# Altium PCB Group6TsvPCB.PcbDoc
Units mil, origin at the board's own origin, x right, y up, seen from the top; angles counter-clockwise.
Board outline 2263.78 x 3543.31 mil, 2 copper layers (Top Layer, Bottom Layer); 32 components, 22 nets, 177 pads, 23 vias.
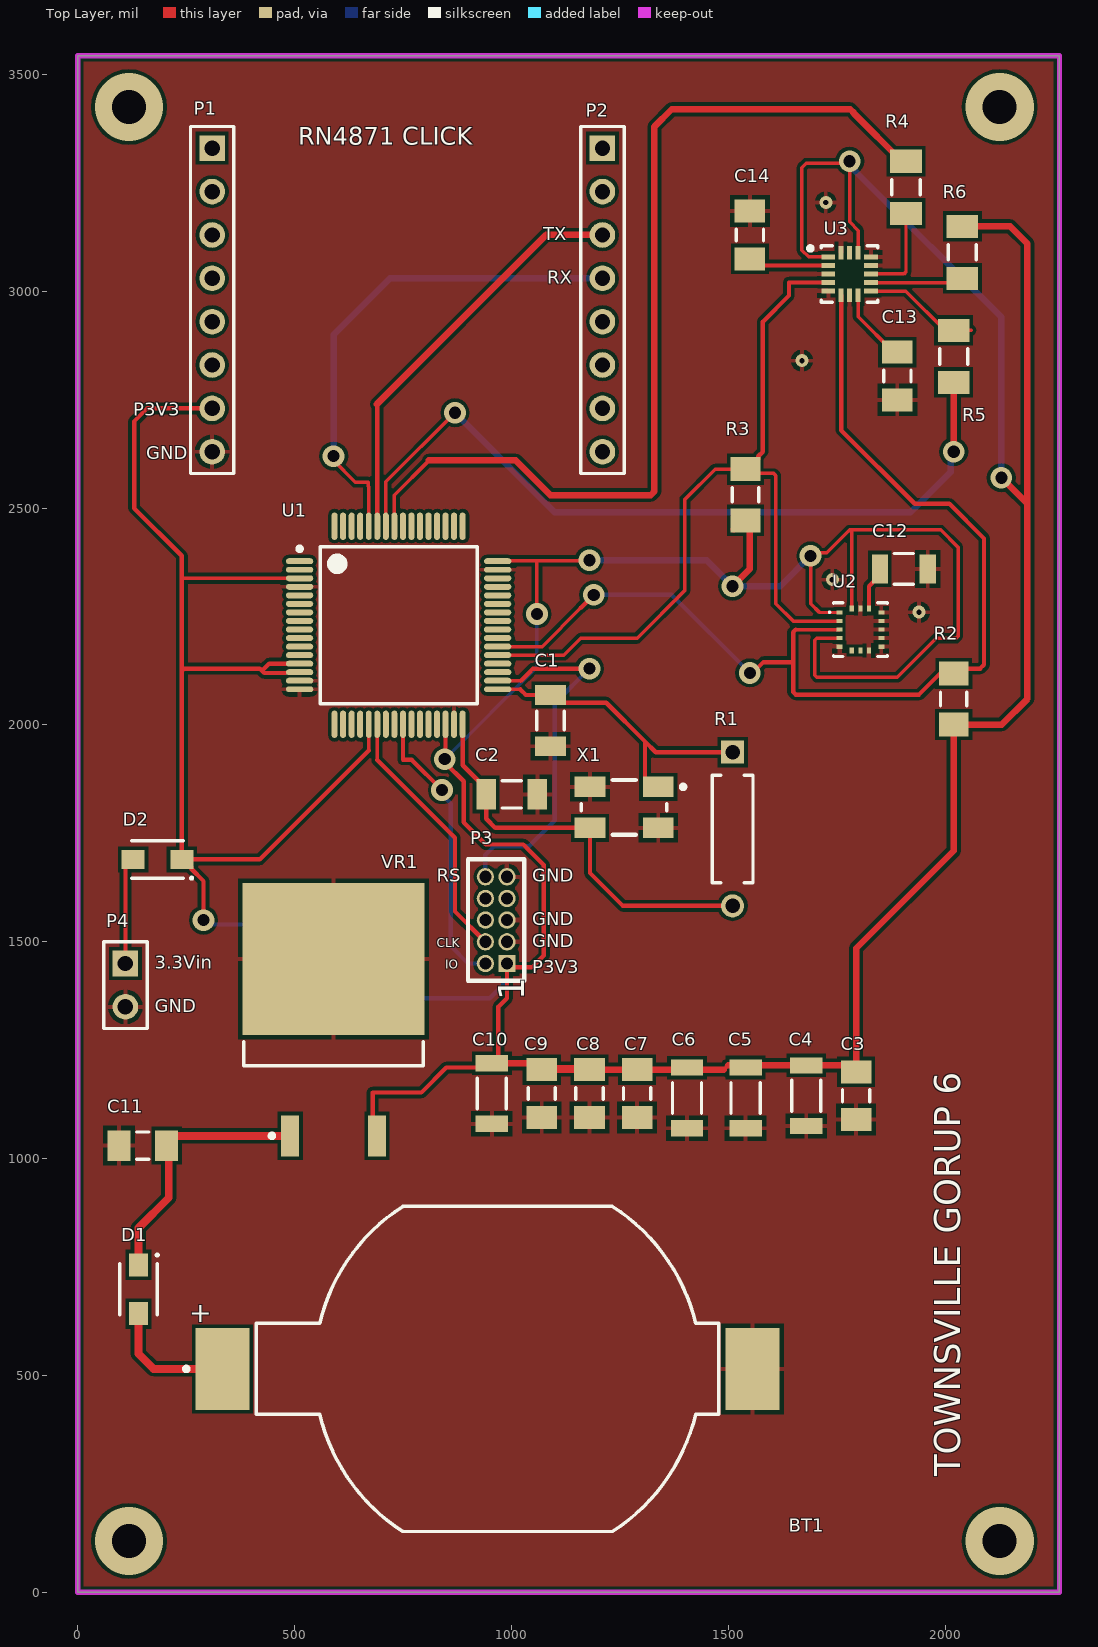
[diagram p0: Top Layer view]
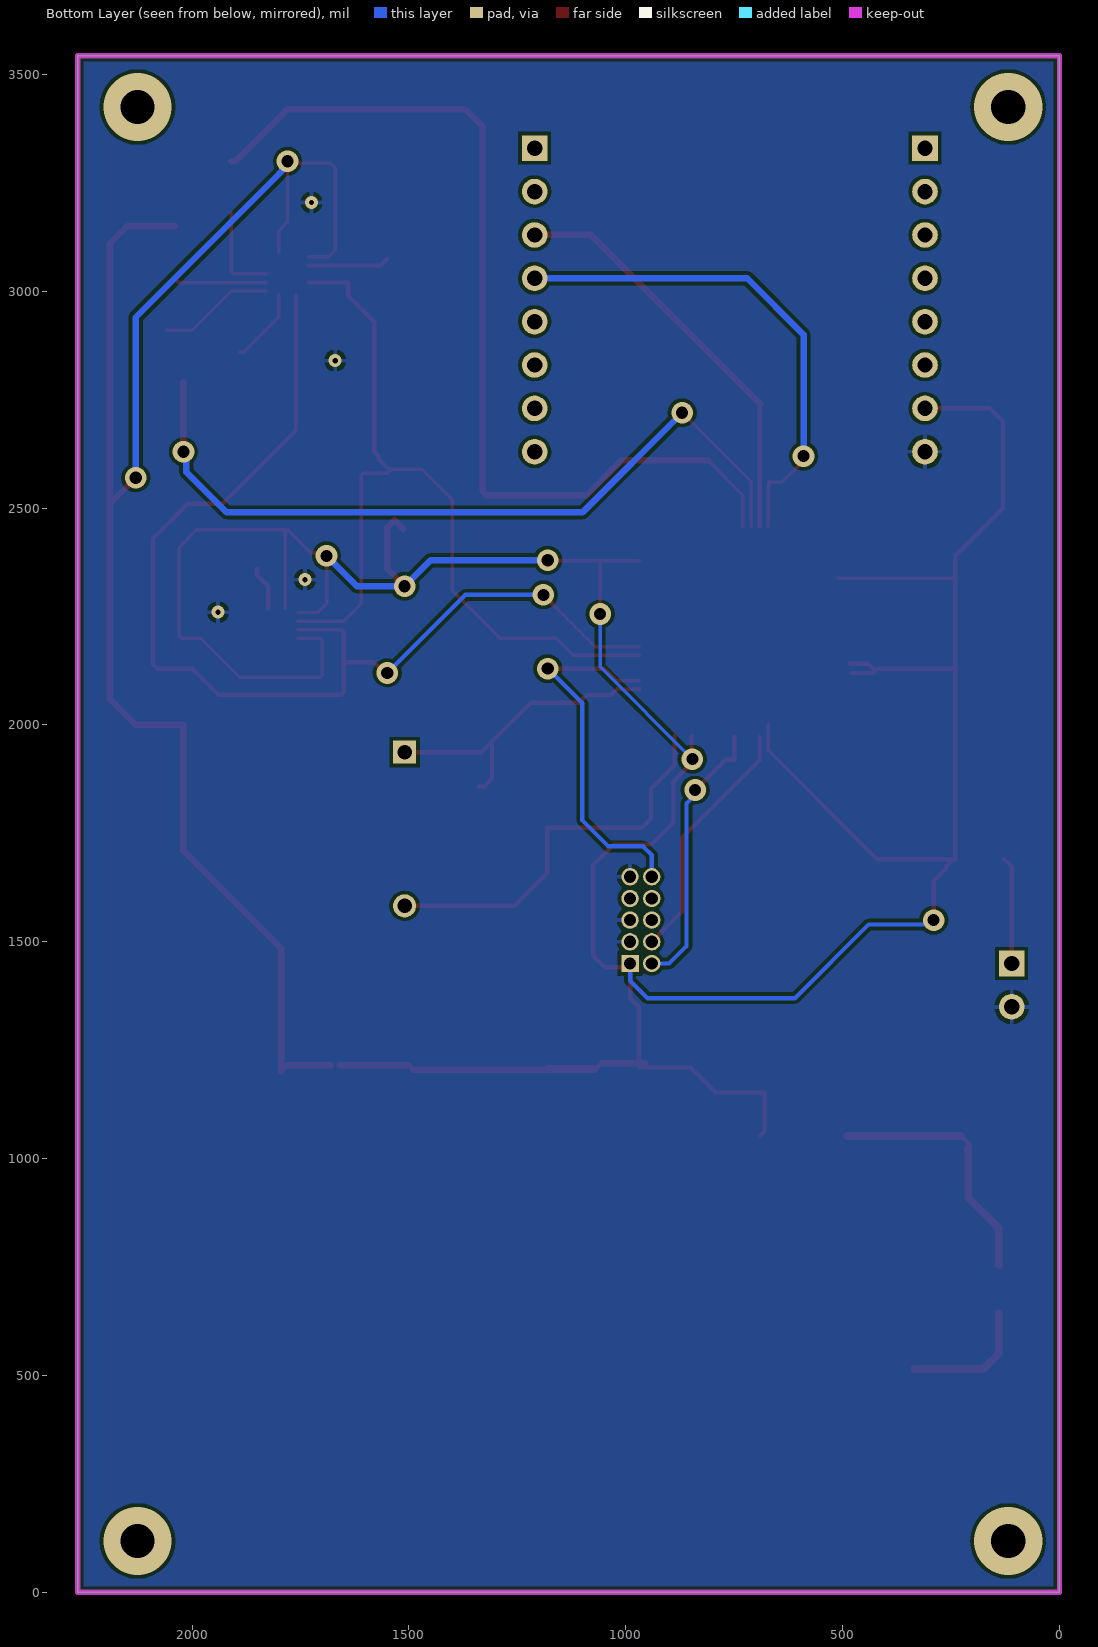
[diagram p1: Bottom Layer view, seen from below]

## Layer stack, top to bottom
Top Solder: solder mask 0.4, Solder Resist, Dk 3.5
Top Layer: signal copper 1.4
Dielectric 1: dielectric 12.6, FR-4, Dk 4.8
Bottom Layer: signal copper 1.4
Bottom Solder: solder mask 0.4, Solder Resist, Dk 3.5

## Board outline
0,0 0,3543.31 2263.78,3543.31 2263.78,0

## Design rules (kind name [scope] priority, off if disabled: settings)
BoardOutlineClearance [All] p1: gap=11.81 ignorepadtopadclearanceinfootprint=FALSE
Clearance [All] p1: gap=8 ignorepadtopadclearanceinfootprint=TRUE
HoleSize [All] p1: absolutevalues=TRUE maxlimit=100 minlimit=12 maxpercent=80.000 minpercent=20.000
MinimumAnnularRing [All] p1: minimumring=6
MinimumSolderMaskSliver [All] p1: minsoldermaskwidth=1
PolygonConnect [All] p1: connectstyle=Relief reliefconductorwidth=10 reliefentries=4 polygonreliefangle="90 Angle" airgapwidth=10
RoutingVias [All] p1: holewidth=28 width=50 viastyle="Through Hole" minholewidth=28 minwidth=50 maxholewidth=28 maxwidth=50
SilkToSilkClearance [All] p1: silktosilkclearance=3.94
SolderMaskExpansion [All] p1: expansion=4 istentingtop=FALSE
Width [All] p1: maxlimit=19.68 minlimit=8 preferedwidth=10
27 further rules are at their usual default settings.

## Classes and differential pairs
component class Sensors: BT1 C10 C12 C14 D1 D2 P3 P4 R2 R3 R4 R5 R6 U2 U3 VR1
component class Microcontroller: C1 C2 C3 C6 C8 P1 P2 R1 U1 X1

## Components (designator, comment, footprint, x,y, rotation, side; value= is the part's Value field where it differs from the comment)
BT1 "796136-1" TECO-796136-1_V 945,515 r0 top
C1 "CAP 22pF 50V 1206(3216)" CAPC1206(3216)100_N 1090,2010 r90 top value=22pF
C2 "CAP 22pF 50V 1206(3216)" CAPC1206(3216)100_N 1000.94,1840 r180 top value=22pF
C3 "GRM319R71H104KA01D" CAPC3216X95X55NL15T25 1795,1145.12 r270 top
C4 "Capacitor 1 uF +/- 10% 25 V 1206" CAPC3216X180X20ML20 1680,1145.12 r270 top value=1µF
C5 "Capacitor 1 uF +/- 10% 25 V 1206" CAPC3216X180X20ML20 1540,1140.12 r270 top value=1µF
C6 "Capacitor 1 uF +/- 10% 25 V 1206" CAPC3216X180X20ML20 1405,1140 r270 top value=1µF
C7 "GRM319R71H104KA01D" CAPC3216X95X55NL15T25 1290,1150.24 r90 top
C8 "GRM319R71H104KA01D" CAPC3216X95X55NL15T25 1180,1150.12 r270 top
C9 "GRM319R71H104KA01D" CAPC3216X95X55NL15T25 1070,1150.24 r270 top
C10 "Capacitor 1 uF +/- 10% 25 V 1206" CAPC3216X180X20ML20 955,1150.12 r270 top value=1µF
C11 "GRM319R71H104KA01D" CAPC3216X95X55NL15T25 150,1030 r180 top
C12 "C1206C103K2RACTU" FP-C1206C-EB-MFG 1904.88,2360 r180 top value="10,000 pF"
C13 "GRM319R71H104KA01D" CAPC3216X95X55NL15T25 1890,2804.88 r270 top
C14 "GRM319R71H104KA01D" CAPC3216X95X55NL15T25 1550,3130 r90 top
D1 "Diode MBR120VLSFT1G" SODFL360X100-2N 140,698.9 r270 top
D2 "Diode MBR120VLSFT1G" SODFL360X100-2N 183.9,1690 r180 top
P1 "Header 8" HDR1X8 310,3330 r270 top
P2 "Header 8" HDR1X8 1210,3330 r270 top
P3 "Header 1.27mm 2x5 PTH" "Header 1.27mm 2x5 PTH" 990,1450 r90 top
P4 "Header 2" HDR1X2 110,1450 r270 top
R1 "MFR-25FBF52-1M" RESA60-630X240 1510,1760 r270 top value=1M
R2 "Resistor 4k7 +/-1% 1206 250 mW" RESC3116X70X50ML13T20 2020,2060 r270 top value=4.7k
R3 "Resistor 4k7 +/-1% 1206 250 mW" RESC3116X70X50ML13T20 1540,2530.94 r270 top value=4.7k
R4 "Resistor 0R +/- 5% 1206 250 mW" RESC3216X60X45ML15T20 1910,3239.96 r90 top value=0
R5 "Resistor 0R +/- 5% 1206 250 mW" RESC3216X60X45ML15T20 2020,2850 r270 top value=0
R6 "Resistor 10k +/-1% 1206 250 mW" RESC3216X60X45ML15T20 2040,3089.96 r90 top value=10k
U1 "MK22FN1M0VLH12" FREE-LQFP-64_M 740,2230 r0 top
U2 "L3GD20H" STM-LGA-16 1804.88,2220 r0 top
U3 "FXOS8700CQR1" FREE-QFN-16-3000X3000DE_V 1780,3040 r0 top
VR1 "3.3V Regulator" D2PAK_N 590,1320.24 r90 top
X1 "ABM3B-8.000MHZ-B2-T" ABRA-ABM3B_V 1260,1810 r180 top

## Footprints (in the part's own frame and the unit in brackets; to place one, negate y for a bottom-side part, rotate by r counter-clockwise, add the part's x,y. Pads: shape width x height; smd on the part's side, far side on the other; paste and mask are expansions set on the pad)
ABRA-ABM3B_V [mm] "SMD, 4-Leads, Body 5x3.2mm"
  rect 1.8x1.2 smd: 1(-2,-1.2) 2(2,-1.2) 3(2,1.2) 4(-2,1.2)
  silkscreen extent -3.58,-1.6 2.5,1.6, body extent -2.5,-1.59 2.5,1.59, height 1.13
CAPC1206(3216)100_N [mm] "Chip Capacitor, Body 3.2x1.6mm, Height 1mm, IPC Medium Density"
  rect 1.15x1.8 smd: 1(-1.5,0) 2(1.5,0)
  silkscreen extent -0.55,-0.8 0.55,0.8, body extent -1.7,-0.9 1.7,0.9, height 1
CAPC3216X95X55NL15T25 [mm] "Chip Capacitor, 2-Leads, Body 3.35x1.75mm, IPC Medium Density"
  rect 1.35x1.8 smd: 1(-1.4,0) 2(1.4,0)
  silkscreen extent -0.35,-0.8 0.35,0.8, body extent -1.68,-0.87 1.68,0.87, height 0.95
CAPC3216X180X20ML20 [mm] "Chip Capacitor, 2-Leads, Body 3.40x1.80mm, IPC Low Density"
  rect 0.95x1.9 smd: 1(-1.775,0) 2(1.775,0)
  silkscreen extent -0.9,-0.85 0.9,0.85, body extent -1.7,-0.9 1.7,0.9, height 1.8
D2PAK_N [mm] "D2-PAK, 4-Leads, Body 8.8x10.4mm, Pitch 2.54mm, Lead Span 15.1mm, IPC Medium Density"
  rect 2.4x1.05 smd: 1(-6.8,2.54) 3(-6.8,-2.54)
  rect 8.9x10.65 smd: 2(3.55,0)
  silkscreen extent -6.92,-5.25 -1.3,5.25, body extent -2.7,-5.28 6.3,5.28, height 4.69
FP-C1206C-EB-MFG [mm]
  rect 0.95x1.7 smd paste+0 mask+0: 1(-1.4,0) 2(1.4,0)
  silkscreen extent -0.55,-0.9 0.55,0.9, body extent -2,-1 2,1, height 0.25
FREE-LQFP-64_M [mm] "TSQFP, 64-Leads, Body 10.00x10.00mm, Pitch 0.50mm, IPC Low Density"
  oval 1.6x0.35 smd: 1(-5.8,3.75) 2(-5.8,3.25) 3(-5.8,2.75) 4(-5.8,2.25) 5(-5.8,1.75) 6(-5.8,1.25) 7(-5.8,0.75) 8(-5.8,0.25) 9(-5.8,-0.25) 10(-5.8,-0.75) 11(-5.8,-1.25) 12(-5.8,-1.75) 13(-5.8,-2.25) 14(-5.8,-2.75) 15(-5.8,-3.25) 16(-5.8,-3.75) 33(5.8,-3.75) 34(5.8,-3.25) 35(5.8,-2.75) 36(5.8,-2.25) 37(5.8,-1.75) 38(5.8,-1.25) 39(5.8,-0.75) 40(5.8,-0.25) 41(5.8,0.25) 42(5.8,0.75) 43(5.8,1.25) 44(5.8,1.75) 45(5.8,2.25) 46(5.8,2.75) 47(5.8,3.25) 48(5.8,3.75)
  oval 0.35x1.6 smd: 17(-3.75,-5.8) 18(-3.25,-5.8) 19(-2.75,-5.8) 20(-2.25,-5.8) 21(-1.75,-5.8) 22(-1.25,-5.8) 23(-0.75,-5.8) 24(-0.25,-5.8) 25(0.25,-5.8) 26(0.75,-5.8) 27(1.25,-5.8) 28(1.75,-5.8) 29(2.25,-5.8) 30(2.75,-5.8) 31(3.25,-5.8) 32(3.75,-5.8) 49(3.75,5.8) 50(3.25,5.8) 51(2.75,5.8) 52(2.25,5.8) 53(1.75,5.8) 54(1.25,5.8) 55(0.75,5.8) 56(0.25,5.8) 57(-0.25,5.8) 58(-0.75,5.8) 59(-1.25,5.8) 60(-1.75,5.8) 61(-2.25,5.8) 62(-2.75,5.8) 63(-3.25,5.8) 64(-3.75,5.8)
  silkscreen extent -5.92,-4.6 4.6,4.6, body extent -6,-6 6,6, height 1.57
FREE-QFN-16-3000X3000DE_V [mm] "QFN, 16-Leads, Body 3.00x3.00mm, Pitch 0.50mm"
  rect 0.8x0.3 smd: 1(-1.25,1) 2(-1.25,0.5) 3(-1.25,0) 4(-1.25,-0.5) 5(-1.25,-1) 9(1.25,-1) 10(1.25,-0.5) 11(1.25,0) 12(1.25,0.5) 13(1.25,1)
  rect 0.3x0.8 smd: 6(-0.5,-1.25) 7(0,-1.25) 8(0.5,-1.25) 14(0.5,1.25) 15(0,1.25) 16(-0.5,1.25)
  silkscreen extent -2.42,-1.65 1.65,1.65, body extent -1.5,-1.5 1.5,1.5, height 1.25
HDR1X2 [mm] "Connector; Header; 2 Position"
  rect 1.5x1.5 hole 0.9: 1(0,0)
  round 1.5 hole 0.9: 2(2.54,0)
  silkscreen extent -1.27,-1.27 3.81,1.27
HDR1X8 [mm] "Connector; Header; 8 Position"
  rect 1.5x1.5 hole 0.9: 1(0,0)
  round 1.5 hole 0.9: 2(2.54,0) 3(5.08,0) 4(7.62,0) 5(10.16,0) 6(12.7,0) 7(15.24,0) 8(17.78,0)
  silkscreen extent -1.27,-1.27 19.05,1.27
"Header 1.27mm 2x5 PTH" [mil] "Header 1.27mm pitch, 2x5, PTH through hole"
  rect 40x40 hole 28: 1(0,0)
  round 40 hole 28: 2(0,50) 3(50,0) 4(50,50) 5(100,0) 6(100,50) 7(150,0) 8(150,50) 9(200,0) 10(200,50)
  silkscreen extent -40,-40 240,90
RESA60-630X240 [mm] "Axial Resistor, 2-Leads, Dia 2.4mm, Body Length 6.3mm"
  rect 1.35x1.35 hole 0.85: 1(-4.5,0)
  round 1.35 hole 0.85: 2(4.5,0)
  silkscreen extent -3.15,-1.2 3.15,1.2, body extent -4.77,-1.19 4.77,1.2, height 2.4
RESC3116X70X50ML13T20 [mm] "Chip Resistor, 2-Leads, Body 3.25x1.65mm, IPC Low Density"
  rect 1.4x1.75 smd: 1(-1.5,0) 2(1.5,0)
  silkscreen extent -0.4,-0.77 0.4,0.77, body extent -1.63,-0.82 1.63,0.82, height 0.7
RESC3216X60X45ML15T20 [mm] "Chip Resistor, 2-Leads, Body 3.3x1.75mm, IPC Low Density"
  rect 1.35x1.85 smd: 1(-1.525,0) 2(1.525,0)
  silkscreen extent -0.45,-0.82 0.45,0.82, body extent -1.65,-0.87 1.65,0.87, height 0.6
SODFL360X100-2N [mm] "SODFL, 2-Leads, Body 1.65x3.60mm, IPC Medium Density"
  rect 1.35x1.1 smd: 1(-1.425,0) 2(1.425,0)
  silkscreen extent -2.05,-1.1 1.5,1.15, body extent -1.8,-0.9 1.8,0.9, height 1
STM-LGA-16 [mm] "LGA, 16-Leads, Body 3x3mm, Pitch 0.5mm"
  rect 0.35x0.25 smd: 1(-1.225,1) 2(-1.225,0.5) 3(-1.225,0) 4(-1.225,-0.5) 5(-1.225,-1) 9(1.225,-1) 10(1.225,-0.5) 11(1.225,0) 12(1.225,0.5) 13(1.225,1)
  rect 0.25x0.35 smd: 6(-0.5,-1.225) 7(0,-1.225) 8(0.5,-1.225) 14(0.5,1.225) 15(0,1.225) 16(-0.5,1.225)
  silkscreen extent -1.85,-1.58 1.58,1.58, body extent -1.5,-1.5 1.5,1.5, height 1
TECO-796136-1_V [mm] "SMD, 2-Leads, Body 32.31x19.05mm"
  rect 3.15x4.78 smd: 1(-15.52,0) 2(15.52,0)
  silkscreen extent -17.77,-9.52 13.54,9.53, body extent -16.15,-9.52 16.17,9.53, height 6.52

## Part data
BT1: library part CMP-002-00002-1, "Battery Connector, 1 Cell, CR2032, 2-Pin SMD, RoHS, Tape and Reel", Colour=Black, Manufacturer="TE Connectivity", Max Voltage Rating (AC)=30V, Package Description="2-Pin Surface Mount Device, Body 32.31 x 19.05 mm", Package Quantity=400, Batteries=1, Case/Package=796136-1, Connector Type=BatteryHolder, Contact Material=Bronze, Contact Plating=Tin, Datasheet URL=http://www.te.com/commerce/DocumentDelivery/DDEController?Action=srchrtrv&DocNm=796136&DocType=Customer+Drawing&DocLang=English&DocFormat=pdf&PartCntxt=796136-1, Datasheet Version=Dec-13, Manufacturer URL=http://www.te.com/, Mounting Technology=SM, Package Reference=796136-1, Packaging=TapeandReel, Pins=2, RoHS Compliant=True
C1 C2: library part CMP-1037-00973-1, "CAP 22pF 50V ±1% 1206 (3216 Metric) Thickness 1mm SMD", Case-EIA=1206, Case-Metric=3216, Rated Voltage="50 V", Tolerance=Â±1%, Max Thickness="1 mm", Technology=SMT
C3 C7 C8 C9 C11 C13 C14: library part CMP-1662-00007-4, "Chip Capacitor, 0.1 uF, +/- 10%, 50 V, -55 to 125 degC, 1206 (3216 Metric), RoHS, Tape and Reel", Manufacturer=Murata, Max Operating Temperature="125 degC", Min Operating Temperature="-55 degC", Package Quantity=4000, Voltage Rating="50 V", ComponentLink1Description="Manufacturer URL", ComponentLink1URL=http://www.murata.com/, ComponentLink2Description=Datasheet, ComponentLink2URL=http://search.murata.co.jp/Ceramy/image/img/A01X/G101/ENG/GRM319R71H104KA01-01.pdf, DatasheetVersion=03/2016, Height="0.85 mm", Lead Pitch="4 mm", Length="3.2 mm", Mount="Surface Mount", Mounting Technology="Surface Mount", PackageDescription="2-Pin Surface Mount Device, Body 3.2 x 1.6 mm", PackageReference="1206 (3216 Metric)", Packaging="Tape and Reel", Pins=2, REACH SVHC="No SVHC", RoHSCompliant=true
C4 C5 C6 C10: library part CMP-001-00006-4, "Chip Capacitor, 1 uF, +/- 10%, 25 V, 1206 (3216 Metric)", Capacitor Type=Ceramic, Case/Package=1206, Max Operating Temperature=125°C, Min Operating Temperature=-55°C, Tolerance=10%, Voltage Rating=25V, Mounting Technology=SM, Pins=2, RoHS Compliant=True
C12: library part CMP-03020-010077-1, "CAP CER 10000PF 200V X7R 1206", Capacitance="10,000 pF", Manufacturer=KEMET, Package=C1206C-EB, Temperature="-55°C to +150°C", Temperature Characteristic=X7R, Temperature Coefficient=15%, Temperature Range High=+150°C, Temperature Range Low=-55°C, Tolerance=0.1, Voltage Rating="200 V", Automotive=Yes, Automotive Grade="Grade 0", Category=Cap, ComponentLink2Description=Datasheet, ComponentLink2URL=https://content.kemet.com/datasheets/KEM_C1007_X8R_ULTRA_150C_SMD.pdf, Device Class L1="Passive Components", Device Class L2=Capacitors, Device Class L3="Ceramic Capacitors", Digikey Description="CAP CER 10000PF 200V X7R 1206", Height=0.88mm, Ipc Land Pattern Name=CAPC320160X78, Lead Free=Yes, Manufacturer Part Number=C1206C103K2RACTU, Material=Ceramic, Mouser Description="Multilayer Ceramic Capacitors MLCC - SMD/SMT 200volts 10000pF X7R 10%", Octopart=https://octopart.com/c1206c103k2ractu-kemet-2299149, RoHS=TRUE
D1 D2: library part CMP-007-0001-1, "MBR120VLSFT1G Schottky Rectifier, 20V, 1A", Component Type=Standard, Design Item ID="Diode MBR120VLSFT1G", Pins=2, Source=JCULibrary.SchLib
P1 P2: "Header, 8-Pin", LatestRevisionDate=17-Jul-2002, LatestRevisionNote="Re-released for DXP Platform.", Publisher="Altium Limited"
P3: library part CMP-005-0002-1, "Header 1.27mm pitch, 2x5, PTH through hole", Component Type=Standard, Design Item ID="Header 1.27mm 2x5 PTH", Pins=10, Source=JCULibrary.SchLib
P4: "Header, 2-Pin", LatestRevisionDate=17-Jul-2002, LatestRevisionNote="Re-released for DXP Platform.", Publisher="Altium Limited"
R1: library part CMP-009-00049-3, "Axial Resistor, 1 MOhm, +/- 1%, 250 mW, -55 to 155 degC, 2-Pin THD, RoHS, Bulk", Case/Package=Axial, Manufacturer=Yageo, Max Operating Temperature=155°C, Min Operating Temperature=-55°C, Package Description="2-Pin Axial Lead, Dia 2.4 mm, Body Length 6.3 mm", Package Quantity=200, Package Reference=MFR-25, Power=250mW, Tolerance=1%, Voltage Rating=250V, Datasheet URL=http://www.yageo.com/documents/recent/Yageo%20LR_MFR_2013.pdf, Datasheet Version=Apr-13, Manufacturer URL=http://www.yageo.com/, Mounting Technology=TH, Packaging=Bulk, RoHS Compliant=True
R2 R3: library part CMP-009-00033-4, "Chip Resistor, 4.7 KOhm, +/- 1%, 0.25 W, -55 to 155 degC, 1206 (3216 Metric)", Case/Package=1206, Max Operating Temperature=155°C, Min Operating Temperature=-55°C, Power=250mW, Tolerance=1%, Voltage Rating=200V, Mounting Technology=SM, Pins=2, RoHS Compliant=True
R4 R5: library part CMP-009-00002-4, "Chip Resistor, 0 Ohm, +/- 5%, 0.25 W, -55 to 155 degC, 1206 (3216 Metric)", Case/Package=1206, Max Operating Temperature=155°C, Min Operating Temperature=-55°C, Power=250mW, Tolerance=5%, Voltage Rating=200V, Mounting Technology=SM, Pins=2, RoHS Compliant=True
R6: library part CMP-009-00016-4, "Chip Resistor, 10 KOhm, +/- 1%, 0.25 W, -55 to 155 degC, 1206 (3216 Metric)", Case/Package=1206, Max Operating Temperature=155°C, Min Operating Temperature=-55°C, Power=250mW, Tolerance=1%, Voltage Rating=200V, Mounting Technology=SM, Pins=2, RoHS Compliant=True
U1: library part CMP-020-00010-2, "Kinetis K22F Sub-Family, 120 MHz ARM(R) Cortex(R)-M4-based Microcontroller with FPU, 1.71 to 3.6 V, -40 to 105 degC, 64-Pin LQFP, RoHS, Tray", Case/Package=LQFP, Manufacturer=Freescale, Max Clock Frequency=120MHz, Max Operating Temperature=105°C, Max Supply Voltage=3.6V, Min Operating Temperature=-40°C, Min Supply Voltage=1.71V, Package Description="64-Pin Low-profile Quad Flat Package, Body 10 x 10 mm, Pitch 0.5 mm", Package Quantity=160, Package Reference=LQFP-64, Package Version="Rev. G, 01/2016", Datasheet URL=http://cache.nxp.com/files/32bit/doc/data_sheet/K22P64M120SF5.pdf, Datasheet Version="Rev. 4, 11/2014", Density=1MB, Interface=UART, Manufacturer URL=http://www.nxp.com/, Mounting Technology=SM, Package URL=http://cache.nxp.com/files/shared/doc/package_info/98ASS23234W.pdf?fsrch=1&sr=1&pageNum=1, Packaging=Tray, Pins=64, RAM Size=128KB, RoHS Compliant=True
U2: library part CMP-1771-00002-2, "MEMS Motion Sensor: Three-Axis Digital Output Gyroscope, 2.2 to 3.6 V, -40 to 85 degC, 16-Pin LGA, RoHS, Tray", Capacitance="1.8E-11 f", Case/Package=CSMD, Frequency="8 MHz", Frequency Tolerance=20ppm, Load Capacitance="18 pF", Max Operating Temperature=70degC, Min Operating Temperature=-20degC, Package Quantity=1000, Resistance="200 Ohm", ComponentLink1Description="Manufacturer URL", ComponentLink1URL=http://www.st.com/, ComponentLink2Description=Datasheet, ComponentLink2URL=http://www.st.com/content/ccc/resource/technical/document/datasheet/35/b1/e0/39/71/57/43/01/DM00060659.pdf/files/DM00060659.pdf/jcr:content/translations/en.DM00060659.pdf, DatasheetVersion="Rev. 2, 03/2013", ESR="200 Ohm", Height="0.043 inch", Length="0.197 inch", Mount="Surface Mount", PackageDescription="16-Pin Land Grid Array Package, Body 3 x 3 mm, Pitch 0.5 mm", PackageReference=LGA-16, Packaging="Tape and Reel", Pins=4, REACH SVHC=Unknown, RoHSCompliant=True, Tolerance=20ppm, Width="0.126 inch"
U3: library part CMP-2000-05129-1, "6-Axis Xtrinsic Sensor with Integrated Linear Accelerometer and Magnetometer, 1.95 to 3.6 V, -40 to 85 degC, 16-Pin QFN, RoHS, Tape and Reel", Manufacturer=Freescale, Maximum Operating Temperature=+85C, Minimum Operating Temperature=-40C, Operating Supply Voltage=1.95Vto3.6V, Package / Case=QFN-16, Package Description="16-Pin Quad Flat No-lead Package, Body 3 x 3 mm, Pitch 0.5 mm", Supply Voltage - Max=3.6V, Supply Voltage - Min=1.95V, Brand=FreescaleSemiconductor, Datasheet URL=https://datasheet.ciiva.com/12175/fxos8700cq-60595-12175213.pdf, Datasheet Version="Rev. 1, 06/2012", Factory Pack Quantity=1000, Manufacturer URL=http://www.nxp.com/, Mounting Style=SMD/SMT, Output Type=Digital, Package Reference=QFN-16, Packaging=Reel, Product Category=BoardMountAccelerationSensors, RoHS=Details, Sensing Axis=X,Y,Z, Tradename=Xtrinsic, Type=6AxisSensor, Unit Weight=0.000808oz
VR1: library part "Volt Reg", "Voltage Regulator", LatestRevisionDate=29-May-2009, LatestRevisionNote="IPC-7351 Footprint Added.", PackageDescription="3-Pin Transistor Outline Package 2.54 mm Pitch, 15.1 mm Lead Span", PackageReference=D2PAK, Published=24-Mar-1999, Publisher="Altium Limited"
X1: library part CMP-003-00021-1, "Ceramic SMD Crystal, 8 MHz, +/- 20 ppm, 18 pF, -20 to 70 degC, 4-Pin SMD, RoHS, Tape and Reel", Case/Package=CSMD, Frequency=8MHz, Frequency Tolerance=20ppm, Load Capacitance=18pF, Manufacturer=Abracon, Max Operating Temperature=70°C, Min Operating Temperature=-20°C, Package Description="4-Pin Surface Mount Device, Body 5 x 3.2 mm", Package Quantity=1000, Package Reference=ABM3B, Resistance=200Ohm, Datasheet URL=http://www.abracon.com/Resonators/abm3b.pdf, Datasheet Version=Aug-15, ESR=200, Manufacturer URL=http://www.abracon.com/, Mounting Technology=SM, Packaging=TapeandReel, Pins=4, RoHS Compliant=True, Tolerance=20ppm

## Via types
v1: diameter 50, hole 28, Top Layer to Bottom Layer, 15 vias
v2: diameter 157.48, hole 78.74, Top Layer to Bottom Layer, 4 vias
v3: diameter 30, hole 12, Top Layer to Bottom Layer, 4 vias

## Nets (pads, with @x,y where several pads share a name; then routed paths per layer and width w, separated by ;. In a path a pad name is that pad's centre, name@x,y a point inside that pad or via, vN(x,y) a via of type N, cw(c..) or ccw(c..) an arc to the next point about the centre after c; other vN are vias at no path point)
GND: BT1.2 C1.1 C2.1 C3.2 C4.2 C5.2 C6.2 C7.1 C8.2 C9.2 C10.2 C11.2 C12.1 C13.2 C14.2 P1.8 P3.3 P3.5 P3.9 P4.2 U1.4 U1.15 U1.16 U1.31 U1.47 U2.5 U2.8 U2.9 U2.10 U2.11 U2.12 U2.13 U2.15 U3.3 U3.5 U3.7 U3.12 U3.13 U3.16 VR1.2 X1.2 X1.4
  other v3: 1940,2260 1740,2335 1670,2840 1725,3205
NetBT1_1: BT1.1 D1.2 | length 301.3
  Top Layer w18: D1.2 140,550 175,515 BT1.1
NetC2_2: C2.2 R1.2 U1.32 X1.3 | length 925.3
  Top Layer w10: U1.32@887.64,1974.2 887.64,1907.05 941.89,1852.8 C2.2 941.89,1783.62 962.76,1762.76 X1.3 1181.26,1658.74 1257.17,1582.83 R1.2
NetC11_1: C11.1 D1.1 VR1.1 | length 600.8
  Top Layer w10: C11.1@210,1025.12 C11.1 205.12,1030.94 C11.1@226.69,1052.52
  Top Layer w18: D1.1 140,840 210,910 C11.1@210,1025.12 ; C11.1@226.69,1052.52 VR1.1
NetC12_2: C12.2 U2.14 | length 102.2
  Top Layer w10: U2.14 1824.57,2320.04 1849.76,2345.24 C12.2
NetC13_1: C13.1 U3.8 | length 173.4
  Top Layer w8: U3.8 1799.68,2941.46 1881.14,2860 C13.1
NetC14_1: C14.1 U3.2 | length 187.1
  Top Layer w10: C14.1 1565.2,3059.68 U3.2
NetD2_2: D2.2 P4.1 | length 248
  Top Layer w10: P4.1 110,1673.35 126.65,1690 D2.2
NetR4_1: R4.1 U3.11 | length 218
  Top Layer w8: U3.11 1905.31,3040 1910,3044.69 R4.1
NetR5_1: R5.1 U3.9 | length 268.3
  Top Layer w8: U3.9 1909.37,3000.63 2000,2910 2060,2910
NetR6_1: R6.1 U3.10 | length 214.8
  Top Layer w8: U3.10 2030.39,3020.32 R6.1
P3V3: C3.1 C4.1 C5.1 C6.1 C7.2 C8.1 C9.1 C10.1 D2.1 P1.7 P3.1 R2.2 R3.2 R6.2 U1.3 U1.13 U1.14 U1.21 U1.30 U1.48 U2.1 U2.4 U2.16 U3.1 U3.14 VR1.3 | length 12610.5
  Top Layer w8: 241.73,2338.27 U1.3 ; 671.1,1941.1 U1.21 ; U1.48 969.45,2378.74 1059.06,2378.74 ; v1(1059.06,2255.91) 1059.06,2378.74 ; v1@1178.25,2378.25 1177.75,2378.74 1059.06,2378.74 ; U3.1 1685.32,3079.37 1670,3094.69 1670,3285 1680,3295 1775,3295 v1(1780,3300) 1780,3160 1800,3140 1800,3089.53 U3.14 ; U2.4 1704.69,2200.32 1700,2195.63 1700,2114.69 1704.69,2110 1890,2110 1980,2200 2025.31,2200 2030,2204.69 2030,2410 1990,2450 1780,2450 ; U2.1 1710.63,2259.37 1690,2280 v1(1690,2390) 1697,2397 1727,2397 1780,2450 ; U2.16 1785.2,2444.8 1780,2450
  Top Layer w10: 241.73,2338.27 240,2340 ; v1(290,1550) 290,1640 261.57,1668.43 261.57,1673.35 D2.1@244.92,1690 ; P1.7 160,2730 130,2700 130,2500 240,2390 240,2340 ; 478.49,2120 430,2120 425,2125 ; U1.13@484.2,2141.42 441.42,2141.42 425,2125 ; 671.1,1941.1 420,1690 D2.1@244.92,1690 ; VR1.3 680,1062.52 680,1152.52 792.52,1152.52 850,1210 970,1210 970,1350 990,1370 P3.1 999.06,1440.94 1047.24,1440.94 1074.8,1468.5 1074.8,1677.17 1027.56,1724.41 940.94,1724.41 890,1775.35 890,1870 v1@848.27,1911.73 ; v1@848.27,1921.26 U1.30@848.27,1974.2 ; C9.1@1055.35,1220 C9.1 ; C9.1@1070,1210.35 C8.1@1180,1210.35 ; 1490.12,1205.24 1500,1215.12 ; C3.1@1780.24,1215 C3.1 ; 240,2124.14 240,2340 ; 240,2124.14 D2.1 D2.1@244.92,1690 ; 240,2124.14 245.86,2130 420,2130 425,2125
  Top Layer w15: C10.1 C9.1@1055.35,1220 ; C9.1@1070,1205.24 C8.1 1490.12,1205.24 ; v1@1178.25,2378.25 v1(1180,2380) ; 1500,1215.12 C4.1@1660,1215.12 ; v1(1510,2320) 1550,2360 1550,2455 1533.11,2471.89 R3.2@1513.05,2451.83 ; C4.1 C3.1@1780.24,1215 ; C3.1 1795,1485 2020,1710 R2.2 2130.94,2000.94 2190,2060 2190,2510 ; R6.2 2150,3150 2190,3110 2190,2510 ; v1(2130,2570) 2190,2510
  Bottom Layer w8: v1(846.46,1921.26) 1059.06,2133.86 v1(1059.06,2255.91)
  Bottom Layer w10: v1@295.86,1540 440,1540 610,1370 950,1370 990,1410 P3.1
  Bottom Layer w15: v1(1180,2380) 1450,2380 v1(1510,2320) 1620,2320 v1(1690,2390) ; v1(1780,3300) 1780,3290.53 1800,3270.53 1800,3270 2130,2940 v1(2130,2570)
PTA0: P3.4 U1.22 | length 577.4
  Top Layer w8: 690.79,1919.21 U1.22@690.79,1974.2
  Top Layer w10: 690.79,1919.21 870,1740 870,1570 P3.4
PTA3: P3.2 U1.25 | length 637.1
  Top Layer w10: U1.25@750,1973.27 750,1920 770,1920 v1(840,1850)
  Bottom Layer w10: v1(840,1850) 840,1839.18 860,1819.18 860,1490 900,1450 P3.2
PTA19: C1.2 R1.1 U1.33 X1.1 | length 726.1
  Top Layer w8: U1.33 1020.12,2082.36
  Top Layer w10: U1.33 U1.33@968.55,2082.16 ; 1020.12,2082.36 1033.42,2069.06 C1.2 1107.64,2051.42 1218.58,2051.42 1308.31,1961.69 ; X1.1 1326.93,1857.24 1308.31,1875.87 1308.31,1961.69 ; R1.1 1332.83,1937.17 1308.31,1961.69
PTB2: R3.1 U1.37 U2.2 U3.4 | length 1973.4
  Top Layer w8: U1.37 1121.1,2161.1 1160,2200 1290,2200 1400,2310 1400,2520 1470,2590 R3.1 1550,2580 1605.31,2580 1610,2575.31 1610,2280 1650.32,2239.68 U2.2
  Top Layer w10: R3.1 1546.89,2590 1569.45,2612.56 1569.45,2619.45 1580,2630 1580,2930 1640.32,2990.32 1640.32,3020.32 U3.4
PTB3: R2.1 U1.38 U2.3 U3.6 | length 2581.9
  Top Layer w8: U1.38 1070.79,2180.79 1160,2270 ; 1655.86,2220 U2.3
  Top Layer w10: 1160,2270 1180,2290 1184.14,2290 1190,2295.86 v1(1190,2300) ; v1(1550,2120) 1556.57,2120 1581.57,2145 1650,2145 ; 1655.86,2220 1650,2214.14 1650,2145 ; U3.6 1760.32,2679.68 1930,2510 2010,2510 2090,2430 2090,2139.06 2080.94,2130 2000,2130 1940,2070 1655.86,2070 1650,2075.86 1650,2145 ; R2.1@2040,2130 R2.1@2050,2130
  Bottom Layer w10: v1(1190,2300) 1370,2300 v1(1550,2120)
PTD0: R4.2 U1.57 | length 2229.6
  Top Layer w8: U1.57 730.16,2530.16 810,2610
  Top Layer w15: 810,2610 1010,2610 1090,2530 1321.21,2530 1330,2538.79 1330,3380 1370,3420 1781.21,3420 1790,3411.21 1790,3410.16 1900.16,3300 R4.2
PTD1: R5.2 U1.58 | length 1814.4
  Top Layer w8: U1.58 710.47,2560.47 v1(870,2720)
  Top Layer w15: v1(2020,2630.04) R5.2
  Bottom Layer w15: v1(870,2720) 1100,2490 1920,2490 2013.3,2583.3 2013.3,2623.34 v1(2020,2630.04)
PTD2: P2.3 U1.59 | length 963.5
  Top Layer w10: 690,2740 690.79,2739.21 U1.59
  Top Layer w15: 690,2740 1080,3130 P2.3
PTD3: P2.4 U1.60 | length 1166.7
  Top Layer w8: v1(590,2620) 590,2610 640,2560 670,2560 670,2550 671.1,2548.9 U1.60
  Bottom Layer w15: v1(590,2620) 590,2900 720,3030 P2.4
RESET: P3.10 U1.34 | length 849.5
  Top Layer w8: U1.34 1021.89,2102.05
  Top Layer w10: 1021.89,2102.05 1039.84,2120 1040,2120 1050,2130 v1(1180,2130)
  Bottom Layer w10: P3.10 940,1700 960,1720 1040,1720 1100,1780 1100,2050 v1(1180,2130)
pads on no net: P1.1 P1.2 P1.3 P1.4 P1.5 P1.6 P2.1 P2.2 P2.5 P2.6 P2.7 P2.8 P3.6 P3.7 P3.8 U1.1 U1.2 U1.5 U1.6 U1.7 U1.8 U1.9 U1.10 U1.11 U1.12 U1.17 U1.18 U1.19 U1.20 U1.23 U1.24 U1.26 U1.27 U1.28 U1.29 U1.35 U1.36 U1.39 U1.40 U1.41 U1.42 U1.43 U1.44 U1.45 U1.46 U1.49 U1.50 U1.51 U1.52 U1.53 U1.54 U1.55 U1.56 U1.61 U1.62 U1.63 U1.64 U2.6 U2.7 U3.15
copper on no net:
  other v2: 118.11,118.11 2125.98,118.11 118.11,3425.2 2125.98,3425.2

## Polygon pours and split planes (outlines as drawn)
GND on Bottom Layer "BOTTOM_GND" (solid, pour order 1): 0,0 0,3543.31 2263.78,3543.31 2263.78,0
GND on Top Layer "TOP_GND" (solid, pour order 0): 0,0 0,3543.31 2263.78,3543.31 2263.78,0

## Keep-outs
Keep-Out Layer:
  the board outline again, w12

## Silkscreen, mask and mechanical layers (free items; w line width, h text height)
Top Overlay:
  text "RN4871 CLICK" at 508,3338 h40
  text "TX" at 1073,3118 h30
  text "RX" at 1083,3018 h30
  text "P3V3" at 128,2713 h30
  text "GND" at 158,2613 h30
  text "RS" at 828,1638 h30
  text "GND" at 1048,1638 h30
  text "GND" at 1048,1538 h30
  text "CLK" at 828,1488 h20
  text "GND" at 1048,1488 h30
  text "3.3Vin" at 178,1438 h30
  text "IO" at 848,1438 h20
  text "P3V3" at 1048,1428 h30
  text "GND" at 178,1338 h30
  text "TOWNSVILLE GORUP 6" at 2035.31,267.84 h60 r90

## Text inside footprints (layer, text, board x,y; h text height)
BT1: Top Overlay "+" at 257.17,623.19 h45.28
P3: Top Overlay "1" at 1030,1365 h60 r90